# Allegro board SATROT-2-4.brd
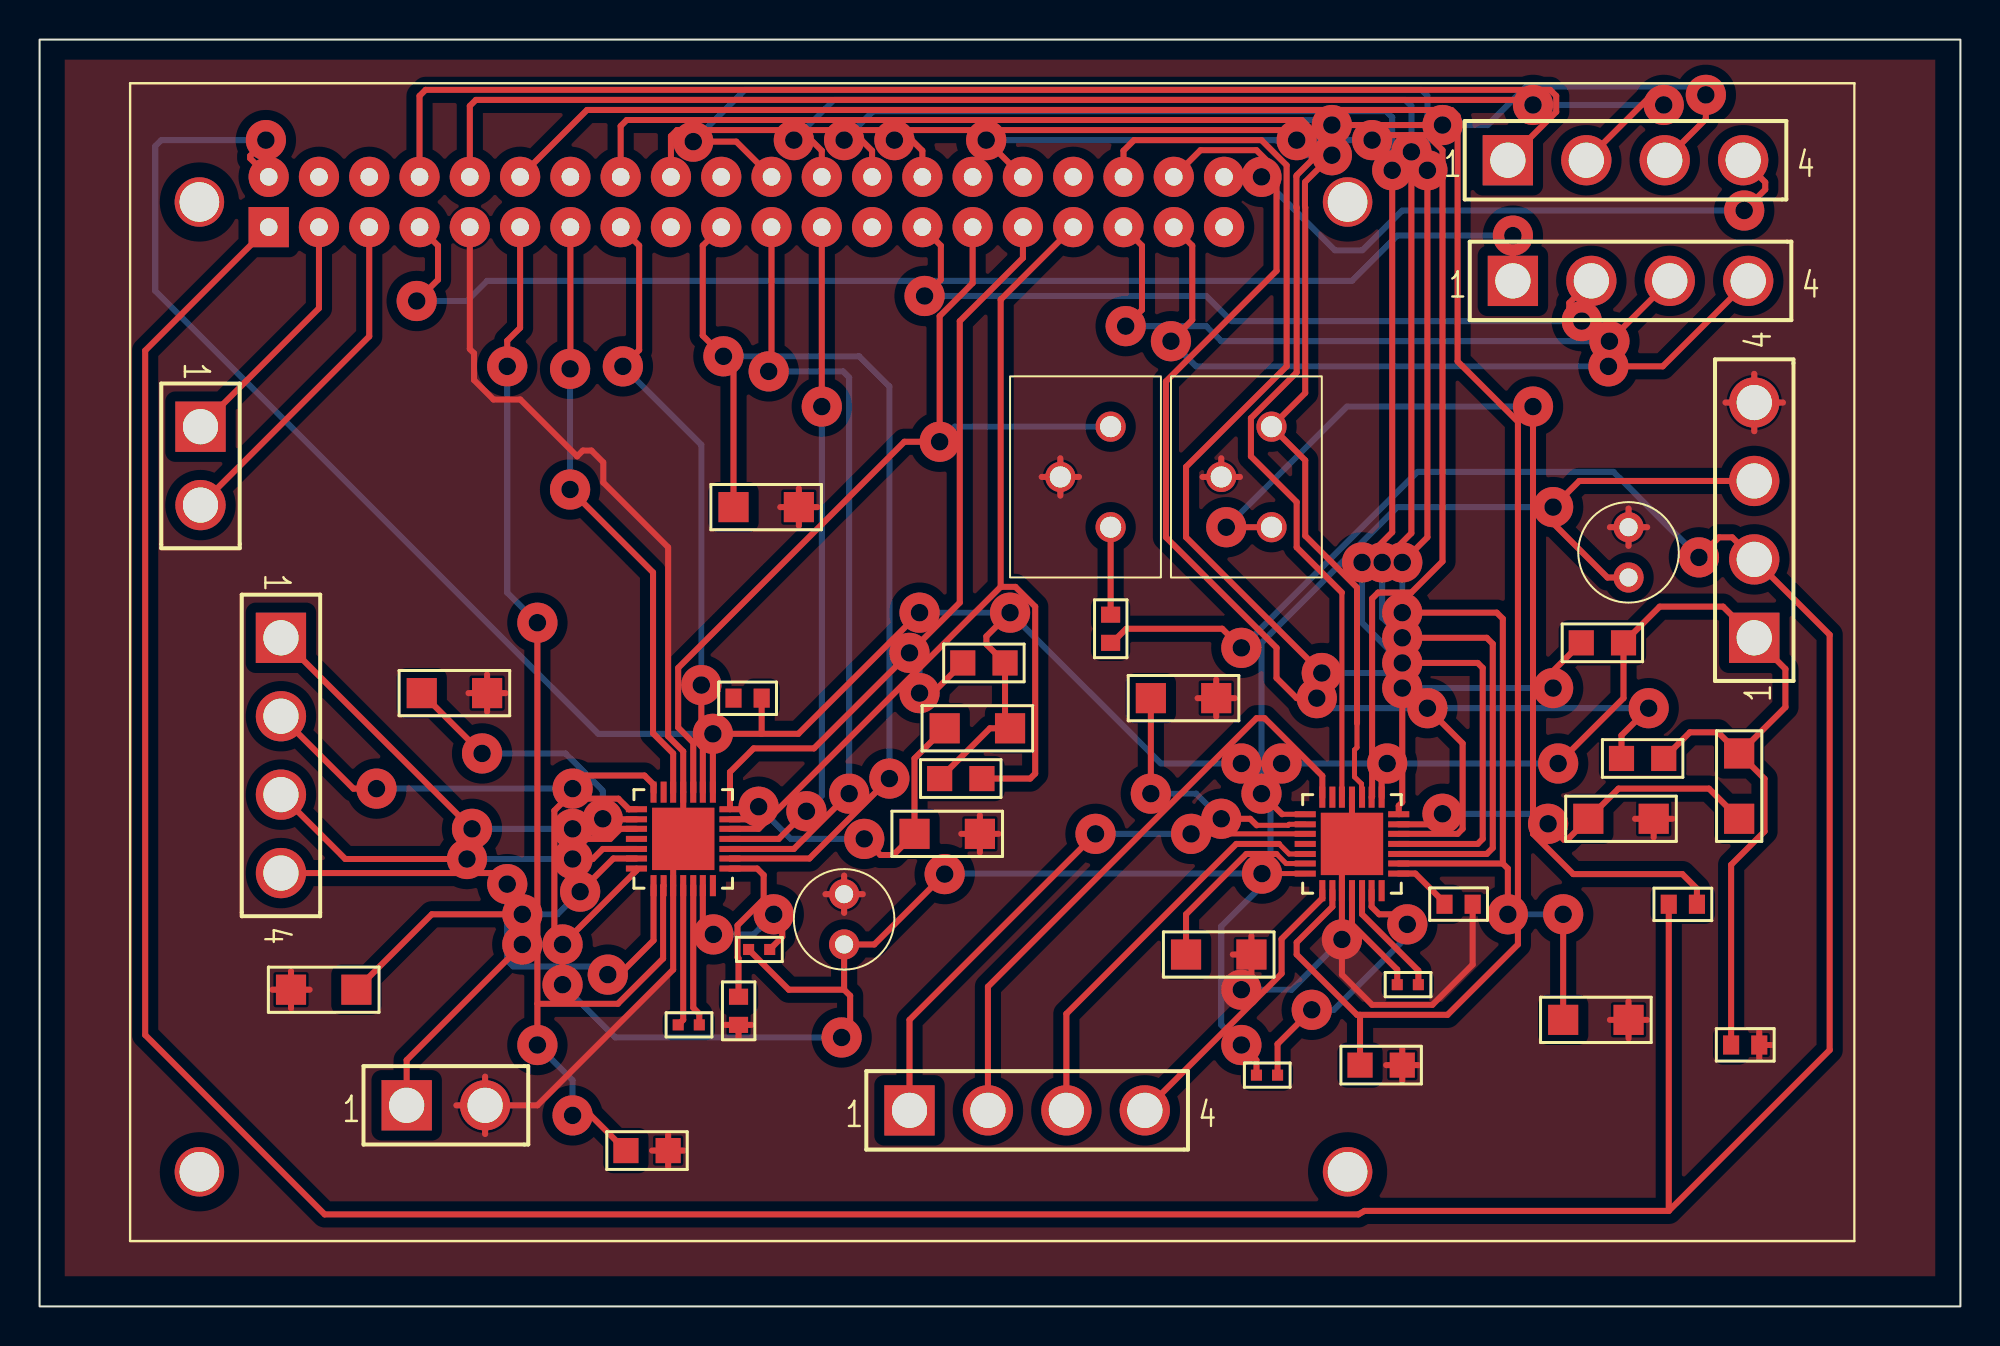
[diagram p0: board, top side]
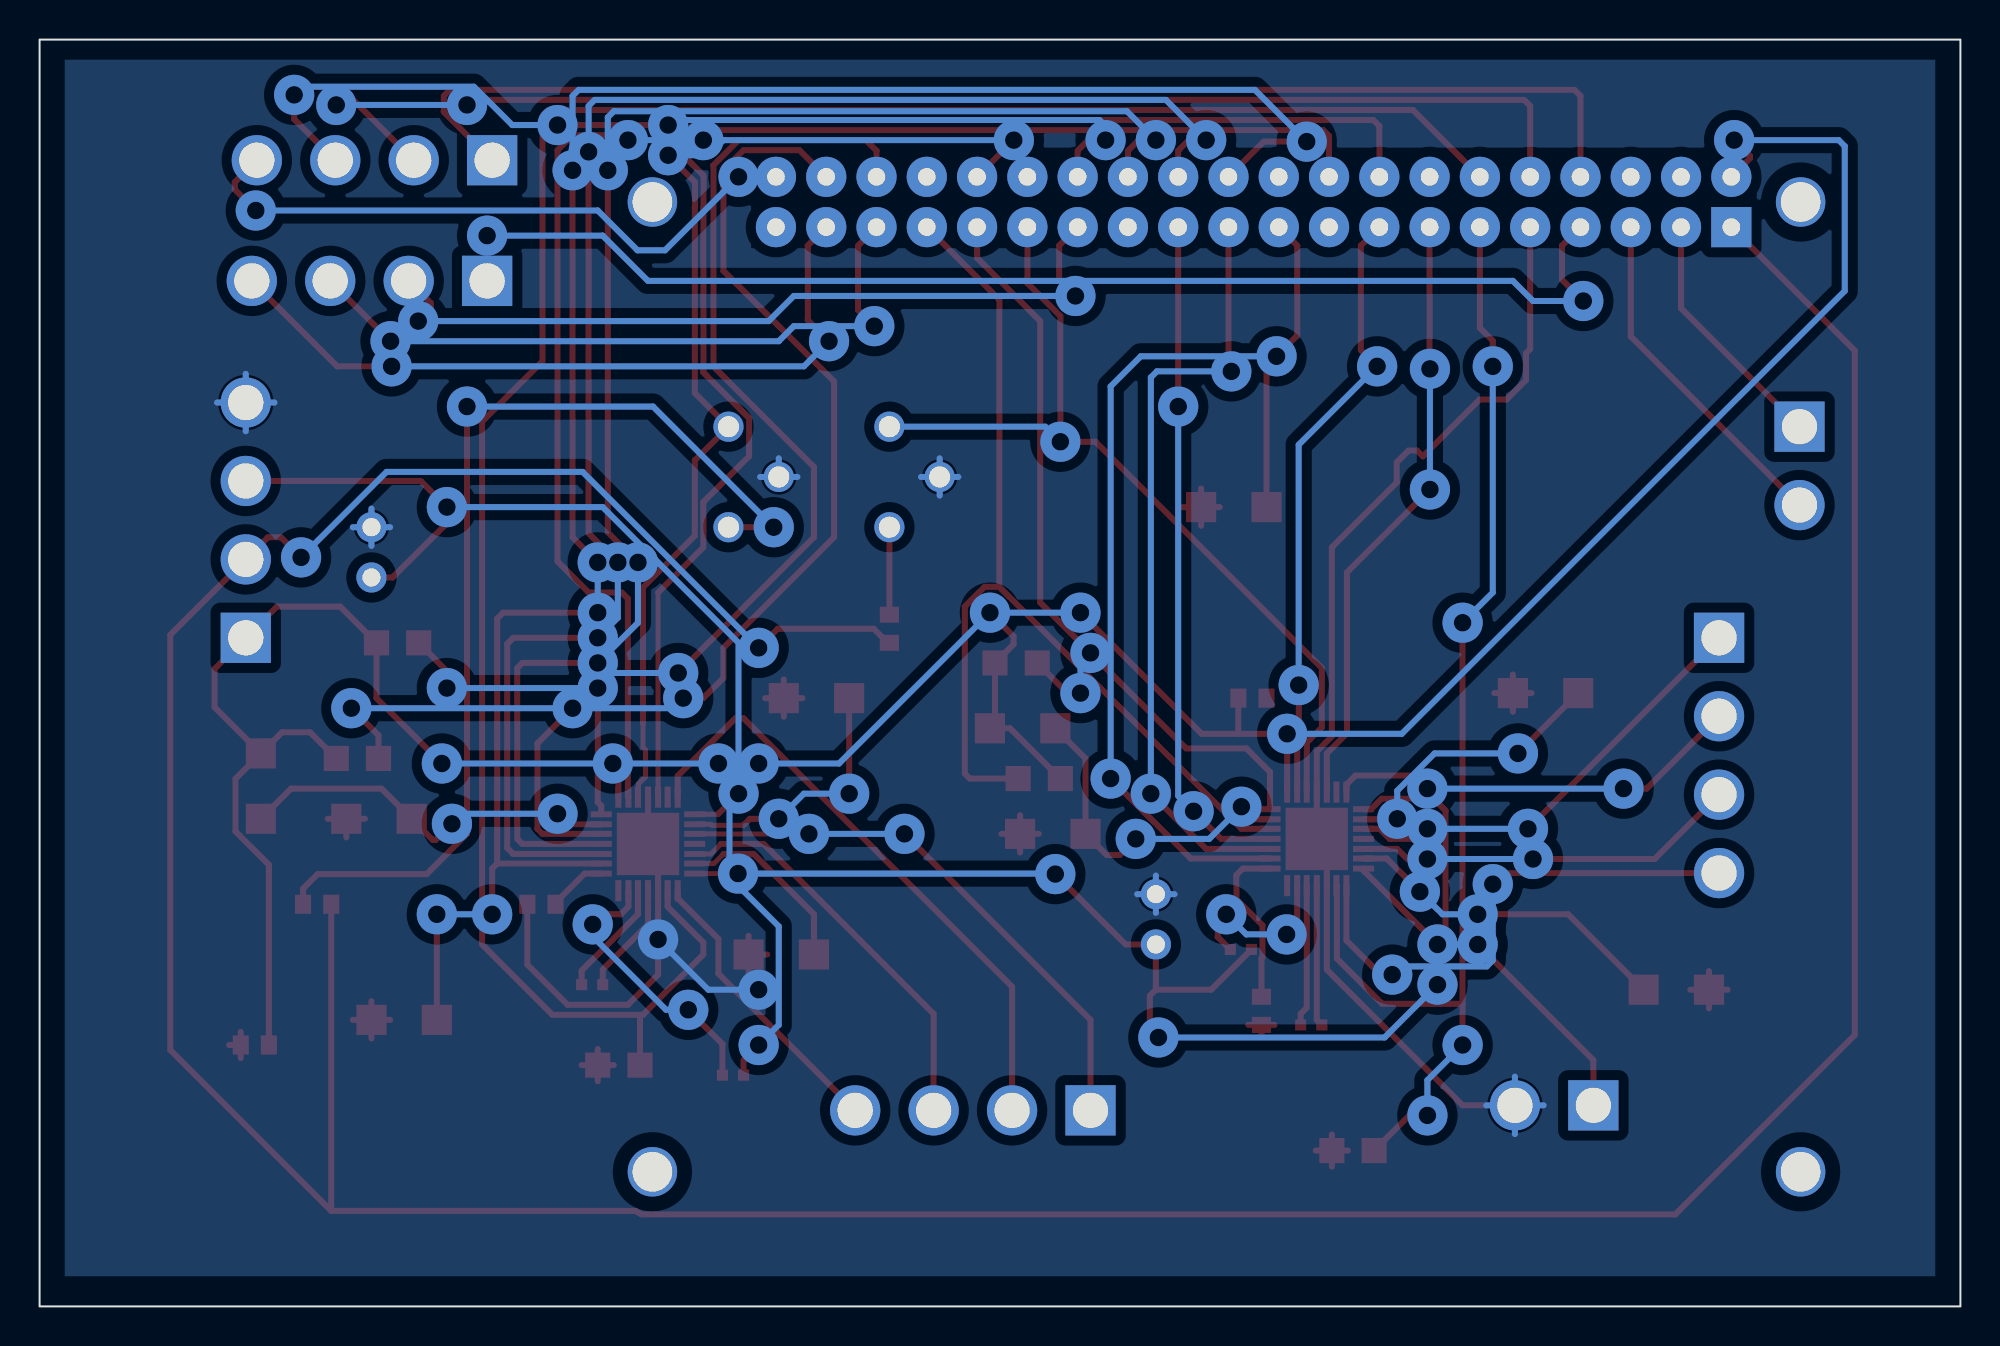
[diagram p1: board, bottom side, seen from below]

Outline 97.03 x 64.01 mm; copper layers: TOP, BOTTOM. Coordinates in mm from the lower left corner of the outline.
Outline path: rectangle 0,0 97.03,64.01

## Design rules (mm)
constraint set DEFAULT: min track width 0.305

## Placement (name value [footprint] x y rotation side)
C1  0.1 uF  [SMC0402]  32.26 14.22 0 top
C2  0.22 uF  [SMC0603]  35.31 14.22 90 top
C3  0.1 uF  [SMC0402]  35.81 18.03 0 top
C4  100 uF  [CAP196]  40.64 18.29 0 top
C5  0.22 uF  [SMC0603]  35.05 30.73 0 top
C6  0.1 uF  [SMC0402]  68.58 16.26 0 top
C7  0.22 uF  [SMC0603]  72.39 20.32 180 top
C8  0.1 uF  [SMC0402]  61.47 11.68 0 top
C9  100 uF  [CAP196]  80.26 36.83 0 top
C10  0.22 uF  [SMC0603]  86.87 13.21 180 top
J2  Az Stepper  [BLKCON156VHTM1SQSW1564]  12.19 33.78 270 top
J3  Motor Power  [BLKCON156VHTM1SQSW1562]  18.54 10.16 0 top
J4  Power Connector  [BLKCON156VHTM1SQSW1564]  86.61 33.78 90 top
J5  El Stepper  [BLKCON156VHTM1SQSW1564]  43.94 9.91 0 top
J6  R_PINs  [BLKCON156VHTM1SQSW1564]  74.17 57.91 0 top
J7  L_PINs  [BLKCON156VHTM1SQSW1564]  74.42 51.82 0 top
J8  I2C  [BLKCON156VHTM1SQSW1562]  8.13 44.45 270 top
R1  10K  [SMR1206]  47.5 23.88 180 top
R2  NP  [SMR1206]  49.02 29.21 180 top
R3  100k  [SMR0805]  45.47 26.67 0 top
R4  100k  [SMR0805]  48.77 32.51 180 top
R5  10K POT  [POT]  54.1 39.37 90 top
R6  20K  [SMR0603]  54.1 33.53 90 top
R7  NP  [SMR1206]  35.05 40.39 0 top
R8  100k  [SMR0805]  31.75 7.87 180 top
R9  0.05  [SMR1206]  19.3 30.99 0 top
R10  0.05  [SMR1206]  16 16 180 top
R11  10K  [SMR1206]  81.53 24.64 180 top
R12  NP  [SMR1206]  85.85 27.94 270 top
R13  100k  [SMR0805]  82.04 27.69 180 top
R14  100k  [SMR0805]  80.01 33.53 180 top
R15  10K POT  [POT]  62.23 39.37 90 top
R16  20K  [SMR0603]  82.3 20.32 0 top
R17  NP  [SMR1206]  76.96 14.48 0 top
R18  100k  [SMR0805]  68.83 12.19 180 top
R19  0.05  [SMR1206]  56.13 30.73 0 top
R20  0.05  [SMR1206]  57.91 17.78 0 top
U1  A4988SETTR-T  [QFN50P500X500X100-29N]  32.51 23.62 90 top
U2  A4988SETTR-T  [QFN50P500X500X100-29N]  66.29 23.37 90 top
U3  Raspberry Pi B+  [GU-RASP-PI-3]  4.57 3.3 0 top

## Library data of the parts
C1-C3 C5-C8 C10 = CAP NP
C4 C9 = CAP POL: Tolerance: ***; User Part Number: ***
J2 J4-J7 = 4 HEADER
J3 = CON2
J8 = HEADER 2
R1-R4 R6-R14 R16-R20 = R
R5 R15 = POT: User Part Number: ***
U1 U2 = A4988SETTR-T
U3 = Raspberry Pi B+

## Footprints (pads in the part's own frame, mm; a bottom-side part is the same pattern mirrored in y, then rotated)
BLKCON156VHTM1SQSW1562
  rect 2.54x2.54 hole 1.778: 1(0,0)
  round 2.54 hole 1.778: 2(3.962,0)
BLKCON156VHTM1SQSW1564
  rect 2.54x2.54 hole 1.778: 1(0,0)
  round 2.54 hole 1.778: 2(3.962,0) 3(7.925,0) 4(11.887,0)
CAP196
  round 1.524 hole 0.914: 1(0,0) 2(0,2.54)
GU-RASP-PI-3
  round 2.5 hole 2 unplated: (3.5,52.5) (3.5,3.5) (61.5,52.5) (61.5,3.5)
  rect 2.032x2.032 hole 0.889: 1(7,51.23)
  round 2.032 hole 0.889: 2(7,53.77) 3(9.54,51.23) 4(9.54,53.77) 5(12.08,51.23) 6(12.08,53.77) 7(14.62,51.23) 8(14.62,53.77) 9(17.16,51.23) 10(17.16,53.77) 11(19.7,51.23) 12(19.7,53.77) 13(22.24,51.23) 14(22.24,53.77) 15(24.78,51.23) 16(24.78,53.77) 17(27.32,51.23) 18(27.32,53.77) 19(29.86,51.23) 20(29.86,53.77) 21(32.4,51.23) 22(32.4,53.77) 23(34.94,51.23) 24(34.94,53.77) 25(37.48,51.23) 26(37.48,53.77) 27(40.02,51.23) 28(40.02,53.77) 29(42.56,51.23) 30(42.56,53.77) 31(45.1,51.23) 32(45.1,53.77) 33(47.64,51.23) 34(47.64,53.77) 35(50.18,51.23) 36(50.18,53.77) 37(52.72,51.23) 38(52.72,53.77) 39(55.26,51.23) 40(55.26,53.77)
POT
  round 1.524 hole 1.067: 1(0,0) 2(5.08,0) 3(2.54,2.54)
QFN50P500X500X100-29N
  rect 1.067x0.305 smd: 1(-2.362,1.499) 2(-2.362,0.991) 3(-2.362,0.508) 4(-2.362,0) 5(-2.362,-0.508) 6(-2.362,-0.991) 7(-2.362,-1.499) 15(2.362,-1.499) 16(2.362,-0.991) 17(2.362,-0.508) 18(2.362,0) 19(2.362,0.508) 20(2.362,0.991) 21(2.362,1.499)
  rect 0.305x1.067 smd: 8(-1.499,-2.362) 9(-0.991,-2.362) 10(-0.508,-2.362) 11(0,-2.362) 12(0.508,-2.362) 13(0.991,-2.362) 14(1.499,-2.362) 22(1.499,2.362) 23(0.991,2.362) 24(0.508,2.362) 25(0,2.362) 26(-0.508,2.362) 27(-0.991,2.362) 28(-1.499,2.362)
  rect 3.15x3.15 smd: 29(0,0)
SMC0402
  rect 0.559x0.559 smd: 1(0,0) 2(1.067,0)
SMC0603
  rect 0.813x0.965 smd: 1(0,0) 2(1.422,0)
SMR0603
  rect 0.813x0.965 smd: 1(0,0) 2(1.422,0)
SMR0805
  rect 1.27x1.27 smd: 1(0,0) 2(2.134,0)
SMR1206
  rect 1.524x1.524 smd: 1(0,0) 2(3.302,0)

## Nets
3V3: J4.2 R6.1 R16.1 U3.1
GND: C2.1 C4.2 C5.1 C7.1 C9.2 C10.1 J3.2 J4.4 R1.1 R5.3 R7.2 R8.1 R9.2 R10.2 R11.1 R15.3 R17.2 R18.1 R19.2 R20.2 U1.3 U1.18 U1.29 U2.3 U2.18 U2.29 U3.9
GND1: U3.6
GND3: U3.14
GND4: U3.20
GND5: U3.25
GND6: U3.30
GND7: U3.34
GND8: U3.39
P3V3: U3.17
P5V: U3.4(P5V#4)
VDD: C5.2 C10.2 J4.1 R2.1 R3.1 R4.1 R12.1 R13.1 R14.1 U1.15 U2.15 U3.2
7/GPIO: J7.1 U3.7
19/GPIO: J7.3 U3.35
27/RESERVED: J7.2 U3.27
28/RESERVED: J6.3 U3.28
37/GPIO: J7.4 U3.37
GPIO: J6.4 U3.40
GPIO/RX: J6.2 U3.10
GPIO/TX: J6.1 U3.8
VMM: C3.1 C4.1 C8.1 C9.1 J3.1 J4.3 U1.22 U1.28 U2.22 U2.28
N00486: J2.1 U1.24
N00488: J2.2 U1.21
N00490: J2.3 U1.26
N00492: J2.4 U1.1
N00665: R1.2 R2.2 U1.13
N00675: R3.2 U1.12 U3.33
N00682: R4.2 U1.14(~SLEEP) U3.31
N00813: R5.1 R6.2
N01051: R5.2(WIPER) U1.17 U3.29
N01158: R8.2 U1.2 U3.11
N01167: R7.1 U1.9 U3.19
N01261: R10.1 U1.27
N01273: R9.1 U1.23
N01454: C1.1 U1.4
N01461: C1.2 U1.5
N01528: C2.2 U1.8
N01594: C3.2 U1.6
N04587: J5.1 U2.24
N04591: J5.2 U2.21
N04595: J5.3 U2.26
N04599: J5.4 U2.1
N04699: R11.2 R12.2 U2.13
N04707: R13.2 U2.12 U3.38
N04715: R14.2 U2.14(~SLEEP) U3.36
N04769: R15.1 R16.2
N04789: R15.2(WIPER) U2.17 U3.32
N04853: R18.2 U2.2 U3.12
N04861: R17.1 U2.9 U3.22
N04909: R20.1 U2.27
N04921: R19.1 U2.23
N04961: C6.1 U2.4
N04969: C6.2 U2.5
N04997: C7.2 U2.8
N05017: C8.2 U2.6
N05607: U1.19 U3.13
N05619: U1.16 U3.15
N05647: U1.10 U3.21
N05659: U1.11 U3.23
N05690: U2.19 U3.16
N05705: U2.16 U3.18
N05729: U2.10 U3.24
N05742: U2.11 U3.26
N09636: J8.1 U3.3
N09640: J8.2 U3.5

Pads without a net: U1 7 20 25; U2 7 20 25

## Via types
v1: diameter 2.032, hole 0.889, TOP to BOTTOM, 104 vias

## Routing (per net, layer and track width the routed paths; a pad name or vN(x,y) marks a point on that pad's centre or on a via; arc(x,y) is an arc through that point)
3V3: length 217.1
  TOP w0.305: 82.3,4.83 66.93,4.83 66.62,4.65 14.4,4.65 5.33,13.72 5.33,48.29 U3.1 ; 82.3,4.83 R16.1 ; 82.3,4.83 90.42,12.95 90.42,33.93 J4.2 85.5,38.86 84.83,38.86 v1(83.82,37.85) ; R6.1 54.18,33.53 54.89,34.24 59.74,34.24 v1(60.71,33.27)
  BOTTOM w0.305: v1(83.82,37.85) 79.5,42.16 69.6,42.16 v1(60.71,33.27)
GND: length 172.1
  TOP w0.305: U2.18 U2.29 65.79,22.86 U2.3 v1(65.79,18.54) 65.79,16.76 67.31,15.24 70.36,15.24 72.39,17.27 C7.1 ; 47.5,22.94 R1.1 ; R1.1 46.56,23.88 ; R1.1 48.44,23.88 ; R1.1 47.5,24.82 ; 58.5,30.73 R19.2 ; R19.2 59.44,29.79 ; R19.2 59.44,31.67 ; R19.2 60.38,30.73 ; 21.06,10.16 J3.2 ; J3.2 22.5,8.71 ; J3.2 22.5,11.61 ; J3.2 25.15,10.16 32,17.02 U1.3 32,23.11 U1.29 U1.18 32.51,28.04 31.75,28.8 31.75,38.35 28.47,41.63 28.47,42.65 27.88,43.24 27.44,43.24 27.15,42.95 24.28,45.82 22.93,45.82 21.95,46.8 21.95,48.16 21.73,48.37 U3.9 ; 80.26,38.43 C9.2 ; C9.2 81.2,39.37 ; C9.2 80.26,40.31 ; C9.2 79.32,39.37 ; R7.2 39.29,40.39 ; R7.2 37.41,40.39 ; R7.2 38.35,39.45 ; R7.2 38.35,41.33 ; J4.4 88.06,45.67 ; J4.4 86.61,47.12 ; J4.4 86.61,44.22 ; J4.4 85.17,45.67 ; R5.3 52.5,41.91 ; R5.3 51.56,40.97 ; R5.3 50.62,41.91 ; R5.3 51.56,42.85 ; 11.76,16 R10.2 ; R10.2 12.7,15.06 ; R10.2 12.7,16.94 ; R10.2 13.64,16 ; R9.2 22.61,31.93 ; R9.2 22.61,30.05 ; R9.2 23.55,30.99 ; R9.2 21.67,30.99 ; 68.83,11.38 R18.1 ; R18.1 69.65,12.19 ; R18.1 68.02,12.19 ; R18.1 68.83,13.01 ; 81.53,23.7 R11.1 ; R11.1 82.47,24.64 ; R11.1 80.59,24.64 ; R17.2 81.2,14.48 ; R17.2 79.32,14.48 ; R17.2 80.26,13.54 ; R17.2 80.26,15.42 ; C4.2 41.58,20.83 ; C4.2 40.64,21.77 ; C4.2 39.7,20.83 ; C4.2 40.64,19.89 ; R15.3 59.69,42.85 ; R15.3 60.63,41.91 ; R15.3 58.75,41.91 ; 86.87,12.55 C10.1 ; C10.1 87.45,13.21 ; C10.1 86.87,13.87 ; v1(60.71,16) 61.21,16.51 R20.2 ; 30.94,7.87 R8.1 ; R8.1 32.56,7.87 ; R8.1 31.75,7.06 ; R8.1 31.75,8.69 ; C2.1 35.97,14.22 ; C2.1 35.31,13.64 ; C2.1 34.65,14.22 ; R20.2 60.27,17.78 ; R20.2 61.21,18.72
  BOTTOM w0.305: C9.2 80.26,40.31 ; C9.2 80.26,38.43 ; C9.2 79.32,39.37 ; C9.2 81.2,39.37 ; R15.3 60.63,41.91 ; R15.3 59.69,42.85 ; R15.3 58.75,41.91 ; 39.7,20.83 C4.2 ; C4.2 41.58,20.83 ; C4.2 40.64,19.89 ; C4.2 40.64,21.77 ; J4.4 86.61,47.12 ; J4.4 88.06,45.67 ; J4.4 86.61,44.22 ; J4.4 85.17,45.67 ; v1(60.71,16) 63.25,16 v1(65.79,18.54) ; R5.3 51.56,42.85 ; R5.3 50.62,41.91 ; R5.3 52.5,41.91 ; R5.3 51.56,40.97 ; 22.5,8.71 J3.2 ; J3.2 21.06,10.16 ; J3.2 23.95,10.16 ; J3.2 22.5,11.61
VDD: length 163.1
  TOP w0.305: U1.15 v1(34.01,28.93) 36.47,28.93 ; v1(49.02,35.05) 47.83,33.86 47.83,33.45 R4.1 48.77,29.46 R2.1 48.01,29.21 R3.1 ; 36.47,28.93 C5.2 ; 36.47,28.93 38.33,28.93 v1(44.45,35.05) ; U2.15 67.79,26.54 68.07,26.82 v1(68.07,27.43) ; C10.2 85.45,22.31 87.13,24 87.13,26.66 R12.1 ; v1(60.71,27.43) v1(62.74,27.43) ; R13.1 83.36,29.01 84.78,29.01 R12.1 ; v1(11.43,58.93) 10.64,58.14 10.64,58.01 U3.2 ; R12.1 88.19,30.28 88.19,32.21 J4.1 85.04,35.36 81.84,35.36 R14.1 80.01,30.73 v1(76.71,27.43)
  BOTTOM w0.305: v1(11.43,58.93) 6.15,58.93 5.84,58.62 5.84,51.31 28.22,28.93 v1(34.01,28.93) ; v1(62.74,27.43) v1(68.07,27.43) v1(76.71,27.43) ; v1(44.45,35.05) v1(49.02,35.05) 56.64,27.43 v1(60.71,27.43)
7/GPIO: length 63.6
  TOP w0.305: J7.1 v1(74.42,54.1) ; U3.7 20.13,53.6 20.13,51.88 v1(19.05,50.8)
  BOTTOM w0.305: v1(74.42,54.1) 68.58,54.1 66.29,51.82 22.61,51.82 21.59,50.8 v1(19.05,50.8)
19/GPIO: length 34.8
  TOP w0.305: v1(54.86,49.53) 55.69,50.35 55.69,53.6 U3.35 ; J7.3 v1(79.3,48.77)
  BOTTOM w0.305: v1(54.86,49.53) 58.93,49.53 59.69,48.77 v1(79.3,48.77)
27/RESERVED: length 40.7
  TOP w0.305: U3.27 45.53,53.6 45.53,51.88 v1(44.7,51.05) ; J7.2 77.27,50.7 77.27,50.42 v1(77.9,49.78)
  BOTTOM w0.305: v1(77.9,49.78) 60.2,49.78 58.93,51.05 v1(44.7,51.05)
28/RESERVED: length 50
  TOP w0.305: v1(43.18,58.93) 44.06,58.93 44.59,58.39 U3.28 ; v1(84.17,61.21) 84.17,59.99 J6.3 ; v1(65.28,59.69) v1(70.87,59.69)
  BOTTOM w0.305: v1(43.18,58.93) 43.18,59.64 43.48,59.94 64.44,59.94 64.69,59.69 v1(65.28,59.69) ; v1(84.17,61.21) 83.76,61.63 75.09,61.63 73.15,59.69 v1(70.87,59.69)
37/GPIO: length 38.1
  TOP w0.305: v1(57.15,48.77) 58.23,49.84 58.23,53.6 U3.37 ; v1(79.25,47.5) 81.99,47.5 J7.4
  BOTTOM w0.305: v1(79.25,47.5) 58.42,47.5 v1(57.15,48.77)
GPIO: length 32.1
  TOP w0.305: v1(86.11,55.37) 87.17,56.43 87.17,56.8 J6.4 ; U3.40 v1(61.72,57.07)
  BOTTOM w0.305: v1(86.11,55.37) 68.83,55.37 66.82,53.36 65.43,53.36 v1(61.72,57.07)
GPIO/RX: length 69.6
  TOP w0.305: U3.10 21.73,60.66 22.04,60.96 75.18,60.96 v1(75.44,60.71) ; J6.2 81.36,61.14 81.61,61.14 v1(82.04,60.71)
  BOTTOM w0.305: v1(75.44,60.71) v1(82.04,60.71)
GPIO/TX: length 66
  TOP w0.305: U3.8 19.19,61.16 19.5,61.47 76.31,61.47 76.61,61.16 76.61,60.35 J6.1
VMM: length 142.7
  TOP w0.254: U2.28 v1(61.75,21.87) ; U2.22 62.76,24.87
  TOP w0.305: U1.28 30.15,22.02 v1(26.42,18.29) ; J3.1 18.54,12.45 v1(24.38,18.29) ; 40.64,16 40.94,15.7 40.94,14.02 v1(40.51,13.59) ; 40.64,16 C4.1 42.16,18.29 v1(45.72,21.84) ; 40.64,16 37.85,16 C3.1 ; v1(26.42,18.29) 26,18.7 26,25.05 26.53,25.58 27.17,25.58 27.24,25.65 29.24,25.65 29.77,25.12 U1.22 ; v1(26.42,18.29) v1(26.42,16.26) ; 62.76,24.87 v1(61.72,25.91) ; C8.1 61.47,12.45 v1(60.71,13.21) ; J4.3 77.77,41.71 v1(76.45,40.39) 76.45,39.57 79.2,36.83 C9.1
  BOTTOM w0.305: v1(61.75,21.87) 62.18,22.3 62.18,25.45 v1(61.72,25.91) 61.72,33.53 68.58,40.39 v1(76.45,40.39) ; v1(61.75,21.87) 45.75,21.87 v1(45.72,21.84) ; v1(61.75,21.87) 61.75,21.26 59.69,19.2 59.69,14.22 v1(60.71,13.21) ; v1(26.42,16.26) 29.08,13.59 v1(40.51,13.59) ; v1(24.38,18.29) v1(26.42,18.29)
N00486: length 22.4
  TOP w0.305: v1(26.92,24.13) 27.43,23.62 28.83,23.62 29.34,24.13 U1.24 ; J2.1 v1(21.84,24.13)
  BOTTOM w0.305: v1(21.84,24.13) v1(26.92,24.13)
N00488: length 21.2
  TOP w0.305: U1.21 31.01,26.37 30.56,26.82 27.58,26.82 v1(26.92,26.16) ; v1(17.02,26.16) 15.85,26.16 J2.2
  BOTTOM w0.305: v1(17.02,26.16) v1(26.92,26.16)
N00490: length 19.5
  TOP w0.305: U1.26 28.45,23.11 27.94,22.61 v1(26.92,22.61) ; v1(21.59,22.61) 15.44,22.61 J2.3
  BOTTOM w0.305: v1(21.59,22.61) v1(26.92,22.61)
N00492: length 26.7
  TOP w0.305: v1(28.7,16.76) 29.29,16.76 31.01,18.49 U1.1 ; v1(23.62,21.34) 23.06,21.89 J2.4
  BOTTOM w0.305: v1(28.7,16.76) 28.29,17.18 23.93,17.18 23.62,17.48 v1(23.62,21.34)
N00665: length 17
  TOP w0.305: U1.13 35.69,24.61 v1(36.32,25.25) ; R2.2 44.2,27.69 R1.2 43.13,22.81 42.47,22.81 v1(41.66,23.62)
  BOTTOM w0.305: v1(41.66,23.62) 37.95,23.62 v1(36.32,25.25)
N00675: length 51.8
  TOP w0.305: R3.2 50.04,26.67 50.29,26.92 50.29,35.36 49.29,36.36 48.55,36.36 ; 48.55,36.36 36.32,24.13 U1.12 ; 48.55,36.36 48.55,50.87 U3.33
N00682: length 42.4
  TOP w0.305: v1(44.45,30.99) 45.11,30.99 R4.2 ; U1.14 34.87,27 36.07,28.19 39.12,28.19 v1(43.94,33.02) 46.48,35.56 46.48,49.78 49.67,52.97 U3.31
  BOTTOM w0.305: v1(44.45,30.99) 44.45,32.51 v1(43.94,33.02)
N00813: length 4.4
  TOP w0.305: R6.2 R5.1
N01051: length 45
  TOP w0.305: U1.17 33.02,28.48 32.26,29.25 32.26,32.26 43.69,43.69 v1(45.47,43.69) 45.47,50.04 47.13,51.7 U3.29
  BOTTOM w0.305: R5.2 46.23,44.45 v1(45.47,43.69)
N01158: length 60.9
  TOP w0.305: v1(25.15,13.21) 25.15,15.29 ; 25.15,15.29 29.21,15.29 31.5,17.58 31.5,21.23 U1.2 ; 25.15,15.29 v1(25.15,34.54) ; v1(26.92,9.65) 27.84,9.65 R8.2 ; v1(23.62,47.5) 23.62,48.79 24.27,49.44 U3.11
  BOTTOM w0.305: v1(23.62,47.5) 23.62,36.07 v1(25.15,34.54) ; v1(26.92,9.65) 26.92,11.43 v1(25.15,13.21)
N01167: length 53.7
  TOP w0.305: U1.9 38.89,22.63 v1(42.93,26.67) ; U3.19 33.5,53.6 33.5,49.05 v1(34.54,48.01) 35.05,47.5 R7.1
  BOTTOM w0.305: v1(34.54,48.01) 41.4,48.01 42.93,46.48 v1(42.93,26.67)
N01261: length 16.9
  TOP w0.305: R10.1 19.81,19.81 v1(24.38,19.81) ; v1(27.3,20.96) 28.98,22.63 U1.27
  BOTTOM w0.305: v1(27.3,20.96) 26.16,19.81 v1(24.38,19.81)
N01273: length 14.3
  TOP w0.305: U1.23 29.34,24.61 29.31,24.64 v1(28.45,24.64) ; R9.1 v1(22.35,27.94)
  BOTTOM w0.305: v1(28.45,24.64) 28.45,26.06 26.56,27.94 v1(22.35,27.94)
N01454: length 7.1
  TOP w0.305: C1.1 32.51,14.48 U1.4
N01461: length 7.2
  TOP w0.305: C1.2 33.32,14.78 33.02,15.09 U1.5
N01528: length 8.6
  TOP w0.305: C2.2 35.31,17.59 35.26,17.64 35.26,19.25 36.58,20.57 36.58,21.79 36.25,22.12 U1.8
N01594: length 8.4
  TOP w0.305: C3.2 37.52,18.67 37.52,19.38 v1(37.08,19.81) ; U1.6 33.5,19.33 v1(34.04,18.8)
  BOTTOM w0.305: v1(37.08,19.81) 36.07,18.8 v1(34.04,18.8)
N04587: length 28.5
  TOP w0.254: v1(58.17,23.88) U2.24
  TOP w0.305: J5.1 43.94,14.48 v1(53.34,23.88)
  BOTTOM w0.305: v1(53.34,23.88) v1(58.17,23.88)
N04591: length 31
  TOP w0.305: U2.21 64.8,26.8 61.88,29.72 61.47,29.72 47.9,16.15 J5.2
N04595: length 20.7
  TOP w0.254: U2.26 63.12,22.86 62.61,23.37
  TOP w0.305: J5.3 51.87,14.78 60.45,23.37 62.61,23.37
N04599: length 14.8
  TOP w0.305: J5.4 62.74,16.81 62.74,18.57 64.8,20.62 U2.1
N04699: length 19.7
  TOP w0.305: U2.13 70.33,24.36 v1(70.87,24.89) ; v1(76.2,24.38) 77.01,23.57 77.16,23.57 R11.2 79.76,26.16 84.33,26.16 R12.2
  BOTTOM w0.305: v1(76.2,24.38) 75.69,24.89 v1(70.87,24.89)
N04707: length 69.2
  TOP w0.305: U2.12 71.63,23.88 71.88,24.13 71.88,28.45 v1(70.1,30.23) ; v1(81.28,30.23) 79.91,28.85 R13.2 ; v1(64.52,30.73) 63.5,30.73 62.48,31.75 62.48,33.27 56.9,38.86 56.9,46.74 62.48,52.32 62.48,57.4 61.47,58.42 58.64,58.42 U3.38
  BOTTOM w0.305: v1(64.52,30.73) 65.02,30.23 v1(70.1,30.23) v1(81.28,30.23)
N04715: length 62.2
  TOP w0.305: v1(76.45,31.24) 76.45,32.11 R14.2 ; U3.36 54.75,58.39 55.29,58.93 61.72,58.93 62.99,57.66 62.99,47.5 57.91,42.42 57.91,38.86 v1(64.77,32) ; v1(68.83,31.24) 68.83,25.48 68.66,25.3 U2.14
  BOTTOM w0.305: v1(64.77,32) 68.07,32 v1(68.83,31.24) v1(76.45,31.24)
N04769: length 52.1
  TOP w0.305: R15.1 v1(59.94,39.37) ; v1(75.44,45.47) 75.44,23.88 77.47,21.84 82.98,21.84 83.72,21.11 R16.2
  BOTTOM w0.305: v1(75.44,45.47) 66.04,45.47 v1(59.94,39.37)
N04789: length 56.1
  TOP w0.254: U2.17 66.78,25.76 66.78,26.4 66.42,26.76 66.42,28.12 66.55,28.24 66.55,29.46
  TOP w0.305: U3.32 v1(47.82,58.93) ; 66.55,29.46 66.55,36.32 63.93,38.94 63.93,42.75 R15.2 63.93,46.15 63.93,55.53 63.92,55.59 63.92,56.76 63.93,56.82 v1(65.28,58.17)
  BOTTOM w0.305: v1(65.28,58.17) 63.25,58.17 62.48,58.93 v1(47.82,58.93)
N04853: length 112.5
  TOP w0.305: 66.7,14.73 66.55,14.73 63.5,17.78 63.5,18.39 65.3,20.19 U2.2 ; 66.7,14.73 R18.2 ; 66.7,14.73 71.12,14.73 74.68,18.29 74.68,19.49 74.75,19.57 74.75,20.05 74.68,20.13 74.68,44.7 71.63,47.75 71.63,60.15 71.32,60.45 27.65,60.45 U3.12
N04861: length 103.3
  TOP w0.305: R17.1 v1(76.96,19.81) ; v1(74.17,19.81) 74.17,22.12 73.91,22.38 ; 73.91,22.38 73.91,34.75 73.61,35.05 v1(68.83,35.05) ; 73.91,22.38 U2.9 ; v1(68.83,37.59) 70.1,38.86 v1(70.1,57.4) ; U3.22 35.19,58.85 v1(33.02,58.85)
  BOTTOM w0.305: v1(33.02,58.85) 35.64,61.47 69.8,61.47 70.1,61.16 v1(70.1,57.4) ; v1(76.96,19.81) v1(74.17,19.81) ; v1(68.83,37.59) v1(68.83,35.05)
N04909: length 9.5
  TOP w0.254: 62.48,22.86 62.97,22.38 U2.27
  TOP w0.305: 62.48,22.86 60.96,22.86 57.91,19.81 R20.1
N04921: length 13.3
  TOP w0.254: 61.48,24.31 63.07,24.31 63.12,24.36 U2.23
  TOP w0.305: R19.1 v1(56.13,25.91) ; 61.48,24.31 61.15,24.64 v1(59.69,24.64)
  BOTTOM w0.305: v1(56.13,25.91) 58.42,25.91 v1(59.69,24.64)
N04961: length 5.7
  TOP w0.305: C6.1 68.58,17.02 66.29,19.3 U2.4
N04969: length 5.9
  TOP w0.305: U2.5 66.8,19.81 69.65,16.97 C6.2
N04997: length 3
  TOP w0.305: U2.8 69.49,21.87 70.97,20.4 C7.2
N05017: length 14
  TOP w0.305: U2.6 67.28,20.19 67.67,19.81 68.58,19.81 v1(69.09,19.3) ; C8.2 62.53,13.26 v1(64.26,14.99)
  BOTTOM w0.305: v1(64.26,14.99) 65.38,14.99 69.09,18.69 v1(69.09,19.3)
N05607: length 30.7
  TOP w0.305: U1.19 32,27.94 30.99,28.96 30.99,37.08 v1(26.8,41.27) ; v1(26.8,47.37) 26.81,47.39 U3.13
  BOTTOM w0.305: v1(26.8,41.27) v1(26.8,47.37)
N05619: length 30.9
  TOP w0.305: U1.16 33.5,28.61 33.43,28.69 v1(33.43,31.39) ; v1(29.46,47.5) 30.29,48.32 30.29,53.6 U3.15
  BOTTOM w0.305: v1(29.46,47.5) 33.43,43.54 v1(33.43,31.39)
N05647: length 39.7
  TOP w0.305: U1.10 38.1,23.11 v1(40.89,25.91) ; U3.21 36.97,47.39 v1(36.83,47.24)
  BOTTOM w0.305: v1(40.89,25.91) 40.89,46.94 40.59,47.24 v1(36.83,47.24)
N05659: length 34.3
  TOP w0.305: U1.11 37.34,23.62 v1(38.73,25.02) ; U3.23 v1(39.51,45.47)
  BOTTOM w0.305: v1(38.73,25.02) 39.51,25.8 v1(39.51,45.47)
N05690: length 74.7
  TOP w0.254: U2.19 65.79,36.07
  TOP w0.305: 65.79,36.07 63.5,38.35 63.5,40.64 61.19,42.95 61.19,44.88 63.5,47.19 63.5,55.48 63.49,55.55 63.49,57.09 63.5,57.15 64.26,57.91 64.26,59.44 63.75,59.94 29.66,59.94 29.35,59.64 U3.16
N05705: length 77.2
  TOP w0.305: v1(63.5,58.93) 62.99,59.44 48.13,59.44 48.06,59.51 47.57,59.51 47.5,59.44 43.5,59.44 43.42,59.51 42.94,59.51 42.86,59.44 40.96,59.44 40.88,59.51 40.4,59.51 40.32,59.44 38.42,59.44 38.34,59.51 37.86,59.51 37.78,59.44 32.2,59.44 31.89,59.13 U3.18 ; U2.16 67.31,25.76 67.31,35.76 67.61,36.07 69.29,36.07 70.87,37.64 70.87,58.42 70.1,59.18 68.15,59.18 67.89,58.93 v1(67.31,58.93)
  BOTTOM w0.305: v1(63.5,58.93) v1(67.31,58.93)
N05729: length 82.9
  TOP w0.305: U3.24 39.51,58.39 38.98,58.93 v1(38.1,58.93) ; v1(69.29,58.33) 69.29,39.07 v1(67.82,37.59) ; U2.10 73.1,22.86 73.41,23.16 73.41,33.48 73.1,33.78 v1(68.83,33.78)
  BOTTOM w0.305: v1(67.82,37.59) 67.82,34.8 v1(68.83,33.78) ; v1(69.29,58.33) 69.29,60.66 68.99,60.96 40.13,60.96 v1(38.1,58.93)
N05742: length 77.6
  TOP w0.305: v1(40.64,58.93) 41.52,58.93 42.05,58.39 U3.26 ; v1(66.8,37.59) 68.33,39.12 v1(68.33,57.4) ; U2.11 72.64,23.37 72.9,23.62 72.9,32.26 72.64,32.51 v1(68.83,32.51)
  BOTTOM w0.305: v1(40.64,58.93) 42.1,60.39 68.02,60.39 68.33,60.08 v1(68.33,57.4) ; v1(66.8,37.59) 66.8,34.54 v1(68.83,32.51)
N09636: length 12.6
  TOP w0.305: J8.1 14.11,50.43 U3.3
N09640: length 17.6
  TOP w0.305: J8.2 16.65,49.01 U3.5

## Copper pours and planes (outline as drawn; the poured copper is in the pictures)
GND on TOP, BOTTOM: 1.27,62.99 1.27,1.52 95.76,1.52 95.76,62.99
